# Altium PCB POVBase.PcbDoc (part 3 of 3)
Units mm, origin at the board's own origin, x right, y up, seen from the top; angles counter-clockwise.
Board outline 80 x 80 mm, 2 copper layers (Top Layer, Bottom Layer); 110 components, 82 nets, 474 pads, 224 vias.
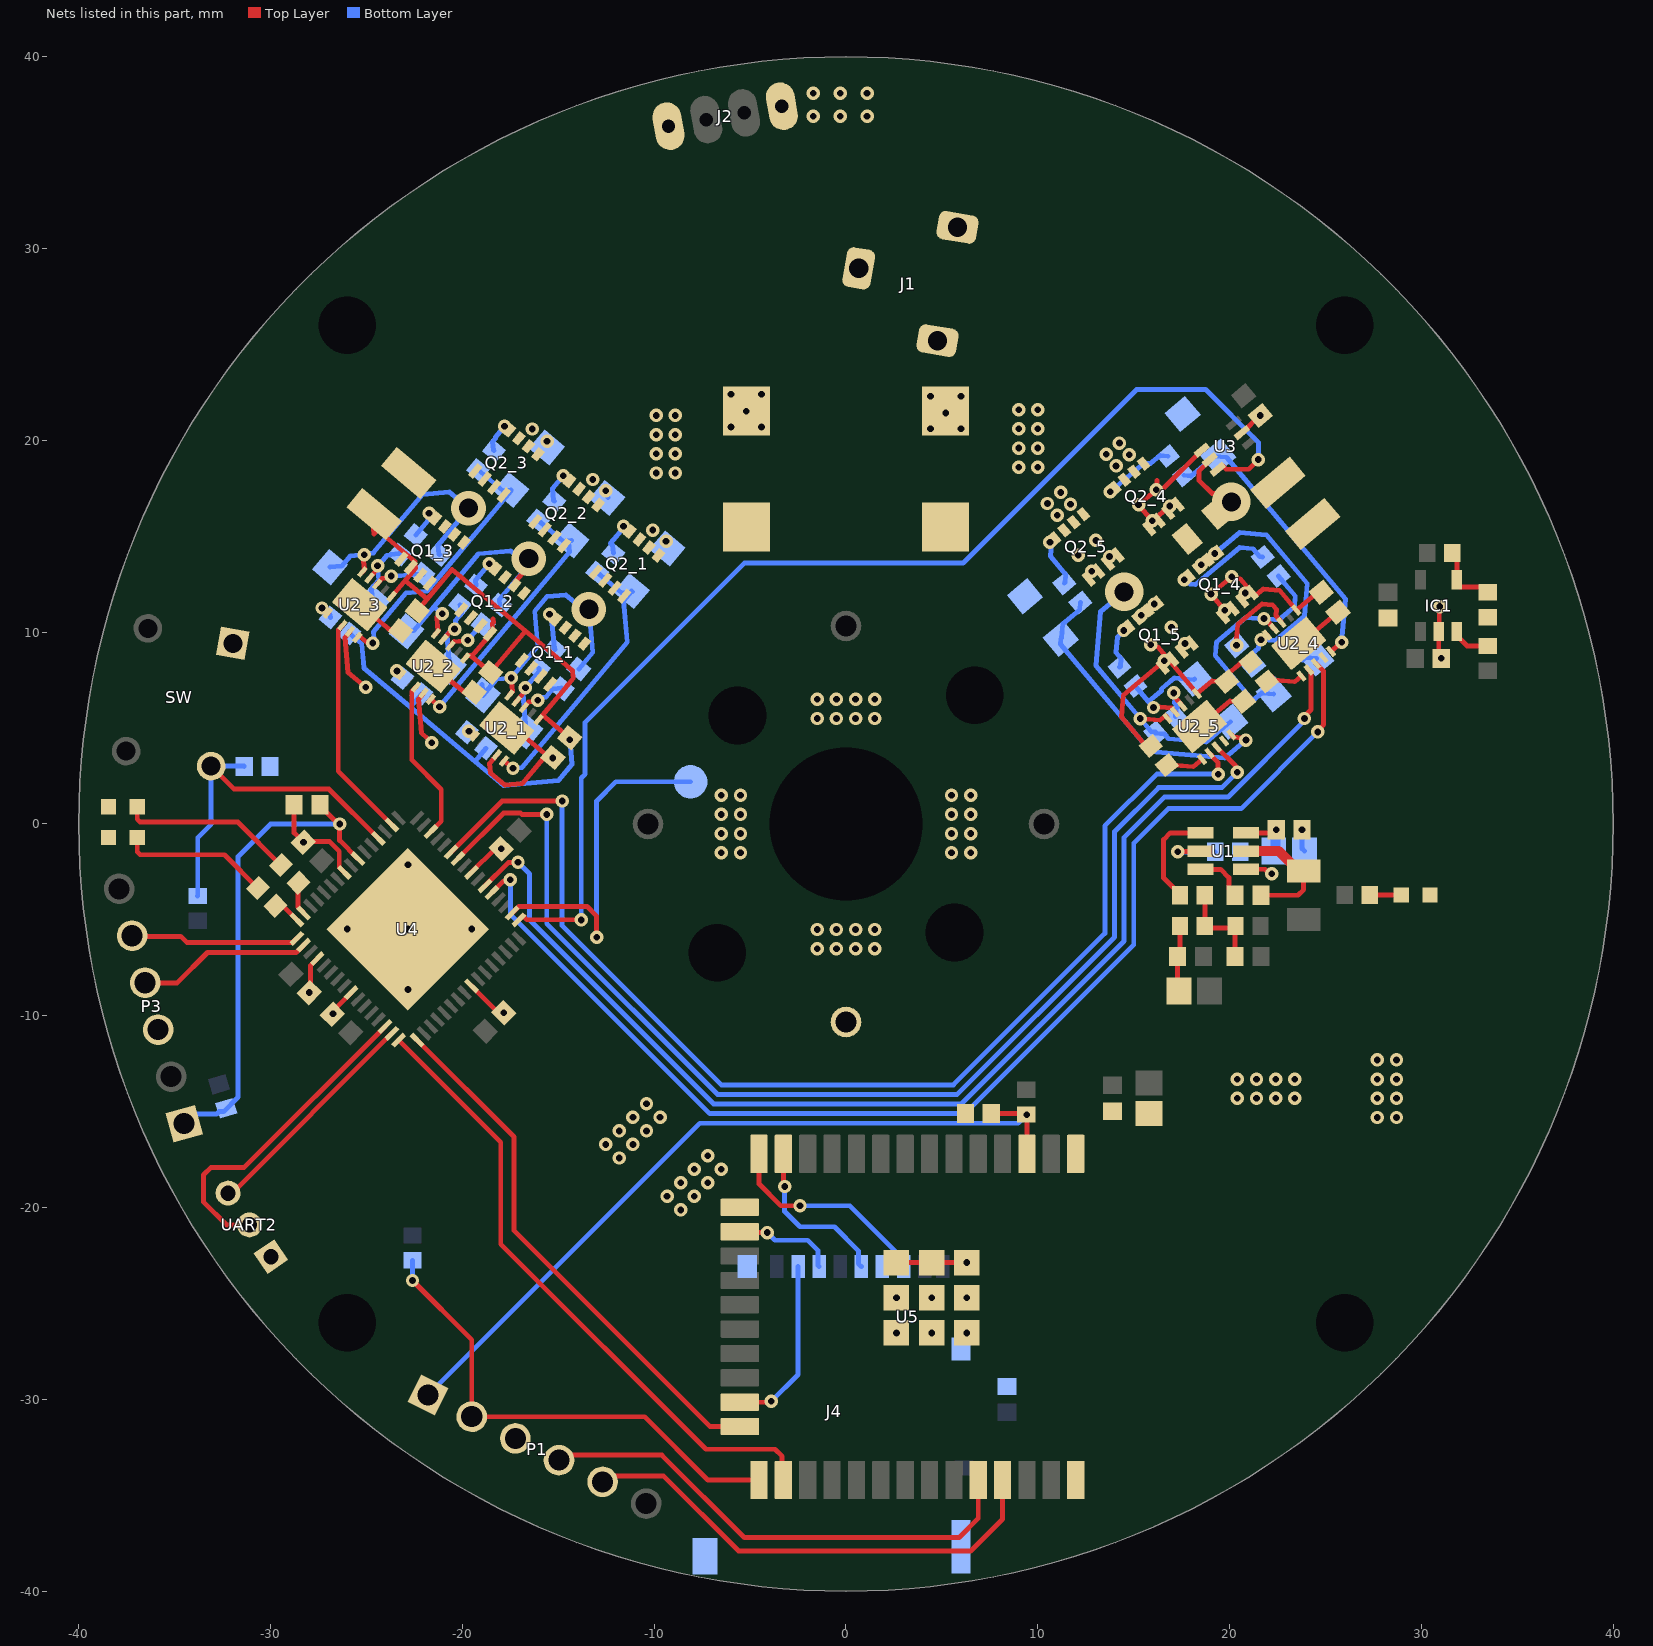
[diagram p2: the nets of this part, all layers, seen from the top]

## Via types
v1: diameter 0.7, hole 0.35, Top Layer to Bottom Layer, tented both sides, 219 vias
v2: diameter 1.8, hole 1, Top Layer to Bottom Layer, tented top, 3 vias
v3: diameter 2, hole 1, Top Layer to Bottom Layer, tented top, 2 vias

## Nets (pads, with @x,y where several pads share a name; then routed paths per layer and width w, separated by ;. In a path a pad name is that pad's centre, name@x,y a point inside that pad or via, vN(x,y) a via of type N, cw(c..) or ccw(c..) an arc to the next point about the centre after c; other vN are vias at no path point) (continued)
BLDC_LOW2: U2_2.8 U4.62 | length 8.5
  Top Layer w0.254: U2_2.8@-22.415,7.146 -22.642,6.919 -22.642,3.342 -21.1,1.8 -21.1,0.151 U4.62@-21.648,-0.397
BLDC_LOW3: U2_3.8 U4.2 | length 11.7
  Top Layer w0.254: U2_3.8@-26.248,10.36 -26.472,10.135 -26.472,2.752 U4.2@-23.678,-0.043
BLDC_OUT1: C11_1.1 D3_1.1 Q1_1.1 Q1_1.2 Q1_1.3 Q2_1.5 Q2_1.6 Q2_1.7 Q2_1.8 U2_1.5 | length 14.2
  Top Layer w0.254: U2_1.5@-17.554,6.72 -17.392,6.913 v1(-17.453,7.617)
  Bottom Layer w0.254: D3_1.1@-18.983,7.266 D3_1.1@-18.934,6.705 -18.225,7.55 v1(-17.453,7.617) -16.07,9.266 -16.23,11.094 -15.587,11.86 -14.604,11.946 -13.684,11.175 v2(-13.4,11.2) -13.203,8.946 C11_1.1@-13.926,8.084
BLDC_OUT2: C11_2.1 D3_2.1 Q1_2.1 Q1_2.2 Q1_2.3 Q2_2.5 Q2_2.6 Q2_2.7 Q2_2.8 U2_2.5 | length 14.6
  Top Layer w0.254: U2_2.5@-21.381,9.934 -21.274,10.061 -21.336,10.765 v1@-21.314,10.791 ; Q1_2.2@-17.275,12.454 -17.286,12.571 -16.511,13.494 v2(-16.541,13.835)
  Bottom Layer w0.254: D3_2.1@-22.917,10.048 -22.532,10.082 -21.487,11.328 ; v1(-21.045,10.957) -21.487,11.328 ; C11_2.1@-18.05,11.414 -18.075,11.696 -16.516,13.554 v2(-16.541,13.835) -16.958,13.799 -17.483,14.24 -19.167,14.093 -21.487,11.328
BLDC_OUT3: C11_3.1 D3_3.1 Q1_3.1 Q1_3.2 Q1_3.3 Q2_3.5 Q2_3.6 Q2_3.7 Q2_3.8 U2_3.5 | length 13.2
  Top Layer w0.254: U2_3.5@-25.214,13.148 -25.107,13.275 -25.146,13.715 -25.025,13.859 v1@-25.036,13.979
  Bottom Layer w0.254: D3_3.1@-26.901,13.39 -26.29,13.444 -25.84,13.98 v1(-25.112,14.044) -25.066,14.099 -24.643,14.136 -22.086,17.183 -20.677,17.306 v2(-19.682,16.471) -19.678,16.433 -21.269,14.537 -21.229,14.082 C11_3.1@-21.191,14.05
COIL_HI1: U2_4.7 U4.54 | length 64.1
  Top Layer w0.254: U4.54@-18.82,-3.225 -17.61,-2.016 -17.116,-2.016 v1(-17.1,-2) ; v1(23.9,5.5) 23.9,5.621 24.243,5.963 24.243,7.921 U2_4.7@24.126,8.037
  Bottom Layer w0.254: v1(-17.1,-2) -16.5,-2.6 -16.5,-5 -6.9,-14.6 6,-14.6 14.5,-6.1 14.5,-0.7 16.6,1.4 19.916,1.4 23.9,5.384 v1(23.9,5.5)
COIL_HI2: U2_5.7 U4.59 | length 62.3
  Top Layer w0.254: U4.59@-20.588,-1.457 -17.93,1.2 v1(-14.8,1.2) ; U2_5.7@18.946,3.69 19.091,3.545 19.091,3.508 19.4,3.199 v1(19.4,2.6)
  Bottom Layer w0.254: v1(-14.8,1.2) -14.8,-5.3 -6.5,-13.6 5.6,-13.6 13.5,-5.7 13.5,-0.1 16.2,2.6 v1(19.4,2.6)
COIL_I_SENSE: U3.6 U4.49 | length 60.6
  Top Layer w0.254: U4.49@-17.052,-4.993 -16.845,-4.786 -16.841,-4.786 -16.634,-4.993 -13.807,-4.993 v1(-13.8,-5) ; U3.6@19.375,18.495 19.536,18.656 19.655,18.656 19.816,18.495 20.995,18.495 v1(21.5,19)
  Bottom Layer w0.254: v1(-13.8,-5) -13.8,-4.879 -13.8,2.4 -13.6,2.6 -13.6,5.3 -5.3,13.6 6.1,13.6 15.154,22.654 18.746,22.654 21.5,19.9 v1(21.5,19)
COIL_LOW1: U2_4.8 U4.53 | length 64.6
  Top Layer w0.254: U4.53@-18.466,-3.579 -17.873,-2.985 -17.585,-2.985 v1(-17.5,-2.9) ; U2_4.8@24.509,8.358 24.851,8.016 24.9,7.968 24.9,5.172 24.6,4.872 v1(24.6,4.8)
  Bottom Layer w0.254: v1(-17.5,-2.9) -17.5,-4.7 -7.1,-15.1 6.2,-15.1 15,-6.3 15,-1 16.8,0.8 20.6,0.8 v1(24.6,4.8)
COIL_LOW2: U2_5.8 U4.58 | length 63
  Top Layer w0.254: U4.58@-20.234,-1.811 -17.855,0.568 -16.966,0.568 -16.899,0.5 v1(-15.6,0.5) ; U2_5.8@19.329,4.012 20.315,3.026 20.315,2.785 v1(20.4,2.7)
  Bottom Layer w0.254: v1(-15.6,0.5) -15.6,-5.2 -6.7,-14.1 5.8,-14.1 14,-5.9 14,-0.4 16.3,1.9 19.6,1.9 v1(20.4,2.7)
COIL_OUT1: C11_4.1 D3_4.1 Q1_4.1 Q1_4.2 Q1_4.3 Q2_4.5 Q2_4.6 Q2_4.7 Q2_4.8 R10.1 U2_4.5 U3.4 | length 23.7
  Top Layer w0.254: v1@16.178,17.424 v1(16.172,17.419) ; 16.221,17.917 v1@16.178,17.425 ; v1(16.879,16.577) 16.668,16.4 16.171,15.982 v1(15.96,15.805) v1(15.253,16.648) v1(16.172,17.419) ; v1(18.528,13.522) v1(19.218,14.101) 19.237,14.078 Q1_4.1@19.371,14.19 ; U3.4@18.54,19.491 16.553,17.505 16.257,17.505 v1@16.178,17.425 ; v1(21.637,9.603) U2_4.5@21.943,9.861 ; v1(16.172,17.419) v1@16.178,17.425
  Bottom Layer w0.254: v1(19.218,14.101) 20.52,15.193 21.929,15.07 24.05,12.542 23.902,10.852 22.753,9.887 ; C11_4.1@21.245,8.263 21.284,8.718 21.156,8.871 21.513,9.171 21.545,9.526 v1(21.637,9.603) 21.663,9.625 22.367,9.564 22.753,9.887 ; D3_4.1@24.524,8.632 23.961,8.681 23.808,8.553 22.747,9.817 22.753,9.887
COIL_OUT2: C11_5.1 D3_5.1 Q1_5.1 Q1_5.2 Q1_5.3 Q2_5.5 Q2_5.6 Q2_5.7 Q2_5.8 U2_5.5 | length 16.3
  Top Layer w0.254: v1(15.342,5.496) 16.366,5.407 16.646,5.642 16.656,5.641 U2_5.5@16.763,5.514 ; v1(15.388,10.887) v1(16.077,11.465) 16.096,11.442 Q1_5.1@16.23,11.555
  Bottom Layer w0.254: v3(14.5,12.1) 13.274,11.072 13.028,8.254 v1(15.342,5.496) 15.904,4.826 16.151,4.804 C11_5.1@16.145,4.734 16.6,4.694 16.809,4.445 18.784,4.272 D3_5.1@20.048,5.333
  other v1: 12.819,13.17 13.738,13.941 12.112,14.012 13.031,14.784
DEBUG_LED1: R16.1 U4.15 | length 1.7
  Top Layer w0.254: R16.1@-28.54,-3.06 -28.576,-3.095 -28.576,-4.333 -28.274,-4.635 U4.15@-28.274,-4.639
DEBUG_LED2: R5.1 U4.16 | length 1.4
  Top Layer w0.254: R5.1@-29.736,-4.264 -29.357,-4.264 U4.16@-28.627,-4.993
EN: R3.1 U1.5 | length 3.1
  Top Layer w0.254: v1(17.299,-1.452) 17.318,-1.433 18.458,-1.433 U1.5@18.476,-1.415
  Bottom Layer w0.254: v1(17.299,-1.452) R3.1@19.249,-1.452
ESP32_EN: C26.1 P1.1 R15.1 U5.3 | length 41.2
  Top Layer w0.254: C26.1@7.575,-15.1 9.35,-15.1 R15.1@9.4,-15.15 9.435,-15.185 U5.3@9.435,-17.2
  Bottom Layer w0.254: P1.1@-21.783,-29.767 -7.616,-15.6 8.976,-15.6 v1(9.423,-15.152)
ESP_C\S\: J4.2 U5.23 | length 9.3
  Top Layer w0.254: U5.23@-5.535,-30.145 -3.945,-30.145 v1(-3.9,-30.1)
  Bottom Layer w0.254: v1(-3.9,-30.1) -2.5,-28.7 J4.2@-2.5,-23.075
ESP_RX: U4.33 U5.24 | length 28
  Top Layer w0.254: U4.33@-22.355,-11.265 -17.3,-16.32 -17.3,-21.2 -7.085,-31.415 U5.24@-5.535,-31.415
ESP_SCK: J4.5 U5.13 | length 8.6
  Top Layer w0.254: U5.13@-3.265,-17.2 -3.265,-18.835 v1(-3.2,-18.9)
  Bottom Layer w0.254: v1(-3.2,-18.9) -3.2,-20.2 -2.4,-21 -0.6,-21 0.647,-22.247 0.647,-22.922 J4.5@0.8,-23.075
ESP_SDI: J4.7 U5.14 | length 11.1
  Top Layer w0.254: U5.14@-4.535,-17.2 -4.535,-18.765 -3.4,-19.9 v1(-2.4,-19.9)
  Bottom Layer w0.254: v1(-2.4,-19.9) 0.2,-19.9 2.777,-22.477 2.777,-22.852 J4.7@3,-23.075
ESP_SDO: J4.3 U5.16 | length 5.3
  Top Layer w0.254: U5.16@-5.535,-21.255 -5.49,-21.3 v1(-4.1,-21.3)
  Bottom Layer w0.254: v1(-4.1,-21.3) -3.7,-21.7 -2,-21.7 -1.457,-22.243 -1.457,-23.018 J4.3@-1.4,-23.075
ESP_TX: U4.32 U5.26 | length 33.4
  Top Layer w0.254: U4.32@-23.324,-11.265 -18,-16.589 -18,-21.9 -7.3,-32.6 -3.7,-32.6 -3.332,-32.968 -3.332,-34.133 U5.26@-3.265,-34.2
FB: R4.1 U1.4 | length 5.3
  Top Layer w0.254: R4.1@17.411,-3.715 17.411,-3.665 16.561,-2.815 16.561,-0.815 16.911,-0.465 U1.4@18.476,-0.465
GND: C3.1 C4.1 C5.2 C6.1 C7.2 C8.1 C9.1 C10.2 C12_1.1 C12_2.1 C12_3.1 C12_4.1 C12_5.1 C14.2 C15.2 C16.2 C17.2 C18.2 C19.2 C20.2 C21.2 C22.2 C23.2 C24.2 C25.1 C26.2 C27.1 D1.2 D2.2 D4_1.1 D4_2.1 D4_3.1 D4_4.1 D4_5.1 D7.2 IC1.2 J1.2 J1.3 J2.4 J4.6 J4.S P1.3 P3.3 P7.1 Q2_1.1 Q2_1.2 Q2_1.3 Q2_2.1 Q2_2.2 Q2_2.3 Q2_3.1 Q2_3.2 Q2_3.3 Q2_4.1 Q2_4.2 Q2_4.3 Q2_5.1 Q2_5.2 Q2_5.3 R6.1 R14.1 SW.1 U1.1 U2_1.9 U2_1.11 U2_2.9 U2_2.11 U2_3.9 U2_3.11 U2_4.9 U2_4.11 U2_5.9 U2_5.11 U3.2 U4.9 U4.20 U4.25 U4.41 U4.56 U4.65 U5.1 U5.15 U5.38 U5.39 UART2.1 | length 52.6
  Top Layer w0.254: C17.2@-28.775,1 -28.775,-0.466 v1(-28.287,-0.955) -28.251,-0.919 -26.922,-0.919 -26.422,-1.419 -26.422,-2.046 -26.422,-2.245 -26.153,-2.514 U4.9@-26.153,-2.518 ; v1(-27.981,-8.79) -27.981,-8.333 -27.923,-8.275 -27.923,-7.383 -27.567,-7.027 U4.20@-27.567,-7.022 ; v1(-26.742,-9.887) -26.742,-9.733 U4.25@-25.799,-8.79 ; U2_3.9@-25.865,10.038 -25.864,10.029 -26.118,9.725 -25.959,7.901 v1(-25.04,7.129) ; U2_3.11@-25.348,11.432 -24.137,10.416 -24.131,10.417 -23.676,10.035 C12_3.1@-23.221,10.075 ; v1(-22.839,-5.478) -22.84,-5.501 U4.65@-22.809,-5.532 ; U2_2.9@-22.032,6.825 -22.031,6.815 -22.288,6.509 -22.132,4.731 -21.596,4.281 v1(-21.592,4.237) ; U2_2.11@-21.515,8.219 -21.512,8.219 -19.846,6.821 C12_2.1@-19.391,6.861 ; U4.41@-19.527,-8.437 -18.121,-9.843 v1(-17.844,-9.843) ; U4.56@-19.527,-2.518 -18.295,-1.286 v1(-17.979,-1.286) ; U2_1.9@-18.204,3.611 -18.204,3.601 -18.582,3.15 -18.539,2.656 -17.786,2.024 -16.879,2.104 -15.793,3.398 C12_1.1@-15.423,3.43 ; U2_1.11@-17.687,5.004 -17.335,5.035 C12_1.1@-15.423,3.43 ; C12_1.1@-15.274,3.466 v1(-15.295,3.442) C12_1.1@-15.423,3.43 ; U5.39@2.63,-22.865 U5.39@4.465,-22.865 v1(6.3,-22.865) ; R6.1@17.411,-5.315 17.411,-6.79 C3.1@17.286,-6.915 17.286,-8.64 C4.1@17.361,-8.715 C4.1@17.449,-8.802 ; U2_5.11@18.429,5.084 20.018,6.418 20.688,6.359 C12_5.1@20.726,6.391 ; U3.2@20.643,20.407 20.673,20.407 21.566,21.3 v1(21.6,21.3) ; U1.1@20.846,-2.365 20.853,-2.358 21.845,-2.358 22.087,-2.6 v1(22.2,-2.6) ; U2_4.11@23.609,9.431 23.715,9.422 C12_4.1@25.649,11.045 ; D1.2@30.294,-3.544 D1.2@30.45,-3.7 ; v1(30.953,11.334) 30.928,11.309 30.928,10.059 IC1.2@30.903,10.034 30.903,8.759 v1(31.028,8.634)
  Bottom Layer w0.254: D4_2.1@-12.42,17.038 D4_2.1@-12.401,17.022 ; v1(23.775,-0.3) 23.775,-1.275 C6.1@23.9,-1.4
  other v1: 2.63,-26.535 4.465,-26.535 6.3,-26.535 2.63,-24.7 4.465,-24.7 6.3,-24.7 -8.621,-20.121 -9.328,-19.414 -7.914,-19.414 -8.621,-18.707 -7.207,-18.707 -7.914,-18 -6.5,-18 -11.814,-17.414 -7.207,-17.293 -12.521,-16.707 -11.107,-16.707 -11.814,-16 -10.4,-16 -11.107,-15.293 -9.693,-15.293 27.7,-15.3 28.7,-15.3 -10.4,-14.586 20.4,-14.3 21.4,-14.3 22.4,-14.3 23.4,-14.3 27.7,-14.3 28.7,-14.3 20.4,-13.3 21.4,-13.3 22.4,-13.3 23.4,-13.3 27.7,-13.3 28.7,-13.3 27.7,-12.3 28.7,-12.3 -22.839,-8.632 -1.5,-6.5 -0.5,-6.5 0.5,-6.5 1.5,-6.5 -26.009,-5.478 -19.509,-5.478 -1.5,-5.5 -0.5,-5.5 0.5,-5.5 1.5,-5.5 -22.839,-2.132 -6.5,-1.5 -5.5,-1.5 5.5,-1.5 6.5,-1.5 -6.5,-0.5 -5.5,-0.5 5.5,-0.5 6.5,-0.5 -6.5,0.5 -5.5,0.5 5.5,0.5 6.5,0.5 -6.5,1.5 -5.5,1.5 5.5,1.5 6.5,1.5 -1.5,5.5 -0.5,5.5 0.5,5.5 1.5,5.5 -1.5,6.5 -0.5,6.5 0.5,6.5 1.5,6.5 -9.38,14.746 -10.07,15.324 11.017,16.096 11.706,16.674 10.502,16.709 11.192,17.287 -12.521,17.381 -13.211,17.96 -9.9,18.3 -8.9,18.3 9,18.6 10,18.6 14.081,18.667 14.77,19.245 13.567,19.28 -9.9,19.3 -8.9,19.3 9,19.6 10,19.6 14.256,19.858 -15.585,19.952 -9.9,20.3 -8.9,20.3 -16.351,20.595 4.4,20.6 6,20.6 9,20.6 10,20.6 -6,20.7 -4.4,20.7 -9.9,21.3 -8.9,21.3 5.2,21.425 -5.2,21.525 9,21.6 10,21.6 4.4,22.3 6,22.3 -6,22.4 -4.4,22.4 -1.7,36.9 -0.3,36.9 1.1,36.9 -1.7,38.1 -0.3,38.1 1.1,38.1
I: TP1.1 U4.50 | length 18.3
  Top Layer w0.254: U4.50@-17.406,-4.639 -17.401,-4.639 -17.062,-4.3 -13.5,-4.3 -13,-4.8 v1(-13,-5.9)
  Bottom Layer w0.254: v1(-13,-5.9) -13,1.2 -12,2.2 TP1.1@-8.1,2.2
IO_0: P1.2 R17.2 U5.25 | length 25.8
  Top Layer w0.254: v1(-22.6,-23.8) -19.51,-26.89 P1.2@-19.51,-30.9 -10.5,-30.9 -7.2,-34.2 U5.25@-4.535,-34.2
  Bottom Layer w0.254: v1(-22.6,-23.8) R17.2@-22.6,-22.75
MCLR: C17.1 P3.1 R20.1 U4.7 | length 25.6
  Top Layer w0.254: C17.1@-27.425,1 -27.425,0.95 -26.475,0 v1(-26.4,0) -26.4,-0.857 U4.7@-25.445,-1.811
  Bottom Layer w0.254: P3.1@-34.503,-15.619 -34.003,-15.119 -32.815,-15.119 -32.688,-14.992 -32.447,-14.992 -31.7,-14.245 -31.7,-1.7 -30,0 v1(-26.4,0)
NetC1_2: C1.2 U1.6 | length 2.7
  Top Layer w0.254: U1.6@18.476,-2.365 19.532,-2.365 19.963,-2.796 19.963,-3.392 C1.2@20.286,-3.715
NetC2_1: C2.1 R2.1 R4.2 R6.2 | length 4.8
  Top Layer w0.254: R6.2@18.711,-5.315 R6.2@18.711,-5.365 ; R4.2@18.711,-3.715 R6.2@18.711,-5.365 ; R2.1@20.211,-5.415 18.761,-5.415 R6.2@18.711,-5.365 ; C2.1@20.286,-6.915 20.286,-5.44 20.286,-5.34 R2.1@20.311,-5.315
NetC11_1_2: C11_1.2 U2_1.3 | length 2.3
  Top Layer w0.254: U2_1.3@-16.788,6.077 -16.543,6.368 -16.241,6.395 v1@-16.164,6.486
  Bottom Layer w0.254: v1@-16.041,6.497 -15.963,6.59 -15.643,6.618 -15.287,7.042 -14.832,7.082 C11_1.2@-14.794,7.05
  other v1: -16.073,6.459
NetC11_2_2: C11_2.2 U2_2.3 | length 2.2
  Top Layer w0.254: U2_2.3@-20.615,9.291 -20.435,9.505 -19.731,9.567 v1(-19.718,9.583)
  Bottom Layer w0.254: v1(-19.718,9.583) -19.059,10.368 C11_2.2@-18.918,10.38
NetC11_3_2: C11_3.2 U2_3.3 | length 2.6
  Top Layer w0.254: U2_3.3@-24.448,12.505 -24.438,12.506 -24.194,12.796 -23.779,12.833 v1(-23.701,12.925)
  Bottom Layer w0.254: v1(-23.701,12.925) -23.682,12.909 -22.097,13.048 C11_3.2@-22.059,13.016
NetC11_4_2: C11_4.2 U2_4.3 | length 4.4
  Top Layer w0.254: v1(20.361,9.316) 20.332,9.35 20.425,10.414 21.685,11.471 22.249,11.422 22.452,11.18 22.423,10.855 22.71,10.513 U2_4.3@22.709,10.503
NetC11_5_2: C11_5.2 U2_5.3 | length 2.2
  Top Layer w0.254: v1(17.091,6.834) 17.169,6.741 17.158,6.61 17.53,6.166 U2_5.3@17.529,6.157
  Bottom Layer w0.254: v1(17.091,6.834) 17.169,6.741 17.132,6.316 17.295,6.121 17.219,6.057 C11_5.2@17.179,5.602
NetC14_1: C14.1 R11.1 SW.2 U4.4 | length 19.1
  Top Layer w0.254: SW.2@-33.097,3.017 -31.897,1.817 -26.953,1.817 U4.4@-24.385,-0.75
  Bottom Layer w0.254: R11.1@-33.8,-3.75 -33.797,-3.747 -33.797,-0.709 -33.097,-0.009 SW.2@-33.097,3.017 -31.392,3.017 C14.1@-31.375,3
NetD1_1: D1.1 R1.2 | length 1.6
  Top Layer w0.254: R1.2@27.3,-3.7 D1.1@28.95,-3.7
NetD2_1: D2.1 R5.2 | length 7.8
  Top Layer w0.254: D2.1@-36.95,-0.7 -36.95,-1.451 -36.801,-1.6 -32.4,-1.6 R5.2@-30.66,-3.34
NetD3_1_2: D3_1.2 R8_1.1 U2_1.4 | length 4.3
  Top Layer w0.254: U2_1.4@-17.171,6.398 -16.721,6.935 -16.723,6.934 v1@-16.753,6.96
  Bottom Layer w0.254: D3_1.2@-16.712,4.841 -16.68,4.88 -16.848,6.805 -16.704,6.977 v1(-16.714,7.098) -15.991,7.959 R8_1.1@-16.003,8.098
NetD3_2_2: D3_2.2 R8_2.1 U2_2.4 | length 4.3
  Top Layer w0.254: U2_2.4@-20.998,9.613 -20.548,10.149 -20.55,10.149 v1@-20.581,10.174
  Bottom Layer w0.254: D3_2.2@-20.696,8.184 -20.663,8.222 -20.807,9.863 -20.55,10.169 -20.508,10.173 -20.34,10.374 -20.361,10.609 -20.053,10.976 -20.089,11.396 R8_2.1@-20.128,11.428
  other v1: -20.407,10.161
NetD3_3_2: D3_3.2 R8_3.1 U2_3.4 | length 4.3
  Top Layer w0.254: U2_3.4@-24.831,12.826 -24.83,12.826 -24.348,13.401 v1@-24.346,13.401
  Bottom Layer w0.254: D3_3.2@-24.679,11.526 -24.743,12.263 -24.358,12.723 v1(-24.423,13.465) -24.379,13.469 -23.929,14.005 -23.759,14.02 -23.727,14.059 -23.307,14.095 R8_3.1@-23.268,14.063
NetD3_4_2: D3_4.2 R8_4.1 U2_4.4 | length 12.5
  Top Layer w0.254: v1(21.791,10.712) 21.879,10.704 22.317,10.183 U2_4.4@22.326,10.182
  Bottom Layer w0.254: D3_4.2@22.303,6.768 21.669,6.824 21.209,6.438 19.249,8.774 19.31,9.479 20.842,10.764 21.758,10.684 v1(21.791,10.712) 21.796,10.705 22.559,10.638 23.376,11.323 23.425,11.887 R8_4.1@22.557,12.921
NetD3_5_2: D3_5.2 R8_5.1 U2_5.4 | length 5.6
  Top Layer w0.254: v1(16.031,6.075) 16.089,6.123 16.969,6.046 U2_5.4@17.146,5.835
  Bottom Layer w0.254: R8_5.1@15.099,7.185 15.774,6.381 ; v1(16.031,6.075) 15.774,6.381 ; D3_5.2@18.184,7.554 18.145,7.522 17.121,7.612 16.452,7.051 16.443,6.942 15.774,6.381
NetD4_1_2: D4_1.2 R9_1.1 U2_1.10 | length 14.6
  Top Layer w0.254: U2_1.10@-17.821,3.289 v1(-17.362,2.904)
  Bottom Layer w0.254: v1(-17.362,2.904) -16.885,2.945 -11.402,9.48 -11.591,11.644 D4_1.2@-11.175,12.14 ; R9_1.1@-12.965,13.119 -11.701,12.058 D4_1.2@-11.137,12.108
NetD4_2_2: D4_2.2 R9_2.1 U2_2.10 | length 13.9
  Top Layer w0.254: U2_2.10@-21.649,6.503 v1(-21.189,6.118)
  Bottom Layer w0.254: v1(-21.189,6.118) -14.423,14.182 -14.465,14.672 D4_2.2@-14.563,14.754 ; R9_2.1@-16.041,15.831 -14.739,14.738 D4_2.2@-14.563,14.754 ; D4_2.2@-14.316,14.775 -14.439,14.765 D4_2.2@-14.563,14.754
NetD4_3_2: D4_3.2 R9_3.1 U2_3.10 | length 14.4
  Top Layer w0.254: U2_3.10@-25.482,9.717 -25.399,9.816 -25.389,9.817 -25,9.49 -24.766,9.51 v1(-24.673,9.433)
  Bottom Layer w0.254: v1(-24.673,9.433) -24.596,9.525 -24.639,10.024 -22.952,12.035 -21.852,12.131 -17.454,17.373 D4_3.2@-17.457,17.411 -17.88,17.374 R9_3.1@-19.182,18.467
NetD4_4_2: D4_4.2 R9_4.1 U2_4.10 | length 15.2
  Top Layer w0.254: U2_4.10@25.275,9.001 v1(25.84,9.475)
  Bottom Layer w0.254: R9_4.1@17.623,18.18 17.991,18.147 18.303,18.409 18.307,18.409 19.221,19.175 19.835,19.122 26.037,11.729 v1(25.84,9.475)
NetD4_5_2: D4_5.2 R9_5.1 U2_5.10 | length 16.1
  Top Layer w0.254: U2_5.10@20.095,4.654 20.202,4.527 20.645,4.488 20.731,4.386 v1(20.851,4.375)
  Bottom Layer w0.254: R9_5.1@12.216,11.554 12.183,11.171 11.302,10.432 11.237,9.688 D4_5.2@11.199,9.656 11.174,9.374 15.864,3.785 19.744,3.446 v1(20.851,4.375)
NetD7_1: D7.1 R16.2 | length 9.1
  Top Layer w0.254: D7.1@-36.95,0.9 -36.95,0.249 -36.801,0.1 -31.7,0.1 R16.2@-29.46,-2.14
NetIC1_3: IC1.3 R12.1 | length 2
  Top Layer w0.254: IC1.3@31.853,10.034 31.853,9.809 32.378,9.284 R12.1@33.453,9.284
NetIC1_4: IC1.4 R13.1 R14.2 | length 3.5
  Top Layer w0.254: R13.1@31.603,14.134 31.853,13.884 31.853,12.509 32.001,12.361 33.176,12.361 R14.2@33.453,12.084
NetQ1_1_4: Q1_1.4 R8_1.2 | length 2.3
  Top Layer w0.254: v1(-15.456,10.928) Q1_1.4@-15.13,10.655
  Bottom Layer w0.254: v1(-15.456,10.928) -15.445,10.808 -15.346,10.724 -15.206,9.126 R8_1.2@-15.168,9.093
NetQ1_2_4: Q1_2.4 R8_2.2 | length 1.9
  Top Layer w0.254: v1@-18.642,13.51 -18.592,13.514 -18.32,13.286 Q1_2.4@-18.271,13.29
  Bottom Layer w0.254: R8_2.2@-19.292,12.424 -19.317,12.705 v1(-18.597,13.563)
NetQ1_3_4: Q1_3.4 R8_3.2 | length 1.8
  Top Layer w0.254: v1(-21.737,16.199) Q1_3.4@-21.412,15.926
  Bottom Layer w0.254: R8_3.2@-22.433,15.059 -21.79,15.824 -21.815,16.106 v1(-21.737,16.199)
NetQ1_4_4: Q1_4.4 R8_4.2 | length 5.4
  Top Layer w0.254: v1@17.609,12.751 v1(17.628,12.728) Q1_4.4@17.877,12.937
  Bottom Layer w0.254: v1(17.628,12.728) 17.749,12.717 17.922,12.51 18.225,12.484 20.523,14.412 21.217,14.352 21.571,13.93 R8_4.2@21.722,13.917
NetQ1_5_4: Q1_5.4 R8_5.2 | length 2.2
  Bottom Layer w0.254: R8_5.2@14.264,8.181 14.302,8.213 14.339,8.633 14.082,8.94 14.152,9.748 14.482,10.025 v1(14.488,10.092)
NetQ2_1_4: Q2_1.4 R9_1.2 | length 2.1
  Top Layer w0.254: v1(-11.599,15.524) Q2_1.4@-11.274,15.251
  Bottom Layer w0.254: R9_1.2@-12.129,14.115 -12.166,14.535 -12.281,14.631 -11.606,15.436 v1@-11.612,15.509
NetQ2_2_4: Q2_2.4 R9_2.2 | length 2
  Top Layer w0.254: v1@-14.721,18.183 -14.719,18.161 -14.416,17.907 Q2_2.4@-14.414,17.886
  Bottom Layer w0.254: R9_2.2@-15.205,16.827 -15.244,16.859 -15.299,17.493 v1(-14.74,18.16)
NetQ2_3_4: Q2_3.4 R9_3.2 | length 1.9
  Top Layer w0.254: v1@-17.785,20.754 -17.783,20.733 -17.557,20.543 Q2_3.4@-17.555,20.522
  Bottom Layer w0.254: R9_3.2@-18.346,19.462 -18.385,19.495 -18.421,19.914 -18.268,20.097 -18.274,20.171 v1(-17.804,20.731)
NetQ2_4_4: Q2_4.4 R9_4.2 | length 4.1
  Top Layer w0.254: v1@13.752,17.347 v1(13.772,17.324) Q2_4.4@14.021,17.533
  Bottom Layer w0.254: v1(13.772,17.324) 15.557,18.822 15.869,18.794 16.367,19.212 R9_4.2@16.787,19.175
NetQ2_5_4: Q2_5.4 R9_5.2 | length 2.5
  Bottom Layer w0.254: v1(10.631,14.689) 10.708,14.596 10.653,13.959 11.456,13.002 11.419,12.582 R9_5.2@11.381,12.55
NetR7_1_2: R7_1.2 U2_1.6 | length 0.4
  Top Layer w0.254: v1(-19.657,4.832) v1(-19.657,4.832) U2_1.6@-19.353,4.575
NetR7_2_2: R7_2.2 U2_2.6 | length 0.3
  Top Layer w0.254: v1(-23.411,7.982) U2_2.6@-23.181,7.789
NetR7_3_2: R7_3.2 U2_3.6 | length 1.1
  Top Layer w0.254: v1(-27.317,11.26) -27.317,11.259 U2_3.6@-27.014,11.003 U2_3.6@-27.014,11.003
  Bottom Layer w0.254: v1(-27.317,11.26) -26.896,10.906 R7_3.2@-26.884,10.766
NetR7_4_2: R7_4.2 U2_4.6 | length 2.1
  Top Layer w0.254: R7_4.2@21.936,7.439 22.202,7.663 22.329,7.511 23.389,7.418 U2_4.6@23.743,7.716
NetR7_5_2: R7_5.2 U2_5.6 | length 2
  Top Layer w0.254: R7_5.2@16.726,3.068 16.765,3.1 18.103,2.983 U2_5.6@18.563,3.369
NetR10_2: R10.2 U3.5 | length 3.5
  Top Layer w0.254: U3.5@18.957,18.993 18.957,18.949 18.4,18.391 18.4,17.916 19.085,17.231 19.181,17.231 19.62,16.792 v3(20.092,16.792)
PGC: P3.5 U4.17 | length 8.8
  Top Layer w0.254: P3.5@-37.218,-5.829 -37.19,-5.856 -34.69,-5.856 -34.372,-6.174 -28.84,-6.174 U4.17@-28.627,-5.962
PGD: P3.4 U4.18 | length 9.1
  Top Layer w0.254: P3.4@-36.539,-8.276 -36.53,-8.285 -36.471,-8.285 -34.871,-8.285 -33.286,-6.7 -28.663,-6.7 -28.278,-6.315 U4.18@-28.274,-6.315
SW: C1.1 L1.1 U1.2 | length 6.8
  Top Layer w0.254: C1.1@21.636,-3.715 23.567,-3.715 23.861,-3.421 L1.1@23.861,-2.44
  Top Layer w0.512: U1.2@20.846,-1.415 22.561,-1.415 23.586,-2.44 L1.1@23.861,-2.44
U0RX: P1.4 U5.34 | length 26.2
  Top Layer w0.254: P1.4@-14.963,-33.167 -14.697,-32.9 -9.6,-32.9 -5.3,-37.2 5.9,-37.2 6.895,-36.205 U5.34@6.895,-34.2
U0TX: P1.5 U5.35 | length 25.3
  Top Layer w0.254: P1.5@-12.69,-34.3 -12.39,-34 -9.5,-34 -5.6,-37.9 6.5,-37.9 8.165,-36.235 U5.35@8.165,-34.2
U4_RX: U4.30 UART2.2 | length 17
  Top Layer w0.254: UART2.2@-31.1,-20.9 -32.3,-20.9 -33.5,-19.7 -33.5,-18.3 -33.1,-17.9 -31.373,-17.9 U4.30@-24.031,-10.558
U4_TX: U4.31 UART2.3 | length 12
  Top Layer w0.254: UART2.3@-32.218,-19.242 -32.008,-19.242 U4.31@-23.678,-10.912
VBAT: C5.1 C6.2 C7.1 C8.2 C9.2 C12_1.2 C12_2.2 C12_3.2 C12_4.2 C12_5.2 C15.1 J1.1 J2.1 Q1_1.5 Q1_1.6 Q1_1.7 Q1_1.8 Q1_2.5 Q1_2.6 Q1_2.7 Q1_2.8 Q1_3.5 Q1_3.6 Q1_3.7 Q1_3.8 Q1_4.5 Q1_4.6 Q1_4.7 Q1_4.8 Q1_5.5 Q1_5.6 Q1_5.7 Q1_5.8 R3.2 R7_1.1 R7_2.1 R7_3.1 R7_4.1 R7_5.1 U1.3 U2_1.1 U2_2.1 U2_3.1 U2_4.1 U2_5.1 | length 77.1
  Top Layer w0.254: C9.2@-24.177,15.936 -24.627,15.399 -24.603,15.118 -24.225,15.568 -24.186,15.13 -22.48,13.698 -22.466,13.544 -22.448,13.333 U2_3.1@-23.682,11.862 ; -22.836,12.558 -21.839,11.722 ; C12_3.2@-22.353,11.109 -21.839,11.722 ; U2_2.1@-19.849,8.648 -19.742,8.775 -19.589,8.789 -19.519,8.73 ; Q1_2.8@-18.558,9.915 Q1_2.8@-18.539,9.899 ; -18.395,10.692 -18.38,10.52 -18.441,10.447 -18.415,10.151 -18.547,9.994 Q1_2.8@-18.539,9.899 ; U2_1.1@-16.022,5.434 -15.915,5.561 -15.819,5.675 ; v1(-14.396,4.393) -14.404,4.487 -15.819,5.675 ; R7_5.1@15.891,4.064 15.609,4.089 14.356,5.582 14.454,6.709 Q1_5.5@16.389,8.332 ; v1(15.892,9.352) 15.97,9.259 16.251,9.235 U2_5.1@18.295,6.799 19.08,7.458 19.82,7.393 C12_5.2@19.858,7.426 19.892,7.81 20.68,8.472 R7_4.1@21.1,8.435 ; Q1_5.5@16.517,8.179 Q1_5.5@16.389,8.332 ; v1(16.599,8.509) Q1_5.5@16.389,8.332 ; v1@19.745,11.144 19.71,10.752 19.706,10.757 v1(19.74,11.145) v1(19.033,11.987) v1(20.105,12.887) 20.168,12.813 20.555,12.779 Q1_4.8@21.152,12.068 21.284,11.911 21.344,11.905 21.751,12.246 22.616,12.171 U2_4.1@23.475,11.146 24.605,12.094 C12_4.2@24.781,12.079 ; U1.3@20.969,-0.465 22.26,-0.465 v1(22.425,-0.3) ; -21.839,11.722 -20.537,13.273 -16.707,10.059 ; -19.519,8.73 C12_2.2@-18.523,7.895 -16.707,10.059 ; -19.519,8.73 Q1_2.8@-18.539,9.899 ; -16.707,10.059 -14.256,8.002 -14.219,7.582 -14.514,7.23 -14.665,7.051 -15.819,5.675
  Bottom Layer w0.254: R7_3.1@-25.888,9.93 -25.249,9.394 -25.138,8.126 -22.751,6.123 ; R7_2.1@-22.134,6.78 -22.681,6.129 -22.751,6.123 ; R7_1.1@-18.764,3.952 -19.342,3.263 ; v1(-14.396,4.393) -14.283,3.107 -14.991,2.264 -17.853,2.013 -19.342,3.263 ; -22.751,6.123 -19.342,3.263
  Bottom Layer w0.512: R3.2@20.549,-1.452 20.601,-1.4 C6.2@22.3,-1.4 22.389,-1.311 22.389,-0.336 v1(22.425,-0.3)
  other v1: 17.672,9.409 16.965,10.252 20.812,12.045
pads on no net: J2.2 J2.3 J4.1 J4.8 J4.9 J4.10 P1.6 P3.6 SW.3 SW.4 U2_1.2 U2_2.2 U2_3.2 U2_4.2 U2_5.2 U4.1 U4.5 U4.6 U4.8 U4.11 U4.12 U4.13 U4.14 U4.21 U4.22 U4.23 U4.24 U4.27 U4.28 U4.29 U4.34 U4.36 U4.37 U4.39 U4.40 U4.42 U4.43 U4.44 U4.45 U4.46 U4.47 U4.48 U4.55 U4.64 U5.4 U5.5 U5.6 U5.7 U5.8 U5.9 U5.10 U5.11 U5.12 U5.17 U5.18 U5.19 U5.20 U5.21 U5.22 U5.27 U5.28 U5.29 U5.30 U5.31 U5.32 U5.33 U5.36 U5.37
copper on no net: | length 1
  Top Layer w0.254: -20.234,-9.144 -20.23,-9.144 -19.781,-9.592 -19.525,-9.592 v1(-19.439,-9.678)

## Polygon pours and split planes (outlines as drawn)
GND on Top Layer "PolygonDirect" (solid, shelved, pour order 29): 11.362,14.819 9.984,16.461 10.015,16.822 14.229,20.358 14.854,20.303 16.111,18.804
VBAT on Top Layer "PolygonDirect" (solid, shelved, pour order 20): 24.558,17.537 26.229,15.546 14.279,5.518 13.575,5.58 12.225,7.188
COIL_OUT2 on Top Layer "PolygonDirect" (solid, shelved, pour order 11): 16.641,11.416 14.198,14.327 12.359,12.784 14.802,9.873
COIL_OUT1 on Top Layer "PolygonDirect" (solid, shelved, pour order 10): 19.781,14.051 17.339,16.962 15.5,15.42 17.943,12.509
VBAT on Top Layer "PolygonDIrect" (solid, shelved, pour order 33): -16.425,5.588 -13.8,3.4 -12.9,3 -11.9,5.8 -10,8.8 -7.6,10.9 -5.4,12.1 -1.9,13.1 0.8,13.2 3,12.9 5.1,12.2 7.2,11.1 9.8,8.9 11.1,7.2 12,5.6 12.6,4.2 16.3,7.2 8.3,17.3 8.3,17.316 2.4,17.316 2.4,22.5 3.3,23.4 5.5,23.4 6.5,24.4 6.5,26.8 -5.7,39 -9.2,39 -10.5,37.7 -10.5,35.2 -2.3,27 -2.3,17.316 -7.3,17.316 -7.3,16.742 -14.859,7.991
GND on Top Layer "PolygonDirect" (solid, shelved, pour order 24): -17.587,20.033 -16.558,21.258 -15.431,21.357 -8.767,15.765 -8.681,14.779 -9.773,13.476
BLDC_OUT3 on Top Layer "PolygonDirect" (solid, shelved, pour order 14): -19.924,14.292 -17.481,17.203 -19.32,18.745 -21.762,15.835
BLDC_OUT2 on Top Layer "PolygonDirect" (solid, shelved, pour order 13): -16.783,11.656 -14.341,14.567 -16.179,16.11 -18.622,13.199
BLDC_OUT1 on Top Layer "PolygonDirect" (solid, shelved, pour order 12): -13.642,9.021 -11.2,11.932 -13.038,13.475 -15.481,10.564
VBAT on Top Layer "PolygonDirect" (solid, shelved, pour order 19): -13.27,5.576 -14.555,4.043 -25.401,13.144 -24.657,14.032 -24.711,14.654 -26.073,15.797 -26.137,16.521 -25.16,17.686 -24.927,17.706 -13.492,8.111
VBAT on Top Layer "PolygonDirect" (solid, shelved, pour order 38): 12.559,4.297 17.855,-1 22.975,-1 22.975,0.325 21.6,1.7 19.2,1.7 14.6,6.3 12.597,4.297
3V3 on Top Layer "PolygonDirect" (solid, shelved, pour order 39): 18.3,-9.5 18.3,-7.8 18.1,-7.6 18.1,-6.5 18.5,-6.1 19.8,-6.1 21.8,-4.1 24.9,-4.1 25.4,-4.6 25.4,-7.5 23.4,-9.5
GND on Top Layer "PolygonDIrect" (solid, shelved, pour order 40): 0.044,-39.917 cw(c0.044,0.044) -39.917,0.044 cw(c0.044,0.044) 0.044,40.004 cw(c0.044,0.044) 40.004,0.044 cw(c0.044,0.044)
COIL_OUT1 on Bottom Layer "PolygonDirect" (solid, shelved, pour order 34): 13.706,16.002 16.084,13.168 18.761,12.934 19.91,13.898 16.31,18.188
COIL_OUT2 on Bottom Layer "PolygonDirect" (solid, shelved, pour order 22): 16.641,11.416 13.169,15.553 11.331,14.01 14.802,9.873
VBAT on Bottom Layer "PolygonDirect" (solid, shelved, pour order 23): 22.105,12.215 20.562,14.054 14.664,9.104 16.207,7.266
3V3 on Bottom Layer "PolygonDirect" (solid, shelved, pour order 35): 22.6,-5.1 22.6,-6.8 21.9,-7.5 20.4,-7.5 20,-7.9 20,-8.8 20.2,-9 23.9,-9 24.7,-8.2 24.7,-4.8 24.3,-4.4 23.3,-4.4
GND on Bottom Layer "PolygonDirect" (solid, shelved, pour order 41): 0.044,-39.917 cw(c0.044,0.044) -39.917,0.044 cw(c0.044,0.044) 0.044,40.004 cw(c0.044,0.044) 40.004,0.044 cw(c0.044,0.044)

## Silkscreen, mask and mechanical layers (free items; w line width, h text height)
Top Overlay:
  circle w1.15: c26,26 r2.1
  circle w0.5: c0,0 r13
  circle w1.15: c-26,-26 r2.1
  circle w1.15: c26,-26 r2.1
  circle w1.15: c-26,26 r2.1
  circle w0.712: c-32.2,-14.9 r0.3
  circle w1.15: c-6.718,-6.718 r2.1
  circle w1.15: c5.657,-5.657 r2.1
  circle w1.15: c-5.657,5.657 r2.1
  circle w1.15: c6.717,6.718 r2.1
  text "BLDC" at -20.646,21.654 h1.52
  text "Coil" at 13.054,20.854 h1.52
  text "Motor" at -35.747,0.453 h0.8
  text "Coil" at -35.847,-1.147 h0.8
  text "3.3V" at 28,-2.5 h1
  text "GND" at -34.096,-10.615 h0.8 r15.5
  text "3V3" at -33.296,-13.015 h0.8 r15.5
  text "Dout" at -29.06,-17.392 h0.8 r34
  text "Din" at -27.86,-19.292 h0.8 r34
  text "GND" at -26.741,-20.95 h0.8 r34
  text "EN" at -20.514,-28.232 h0.8 r63.5
  text "IO0" at -18.24,-29.365 h0.8 r63.5
  text "GND" at -15.967,-30.499 h0.8 r63.5
  text "RX" at -13.694,-31.632 h0.8 r63.5
  text "TX" at -11.421,-32.766 h0.8 r63.5
Bottom Overlay:
  circle w0.5: c0,0 r13
  circle w1.15: c-26,-26 r2.1
  circle w1.15: c26,-26 r2.1
  circle w1.15: c-26,26 r2.1
  circle w1.15: c26,26 r2.1
  circle w1.15: c-6.718,-6.718 r2.1
  circle w1.15: c5.657,-5.657 r2.1
  circle w1.15: c-5.657,5.657 r2.1
  circle w1.15: c6.717,6.718 r2.1
  text "JLCJLCJLCJLC" at 4.7,-30.9 h0.8
Mechanical 1:
  circle w0.254: c0,0 r17.9
Board Outline:
  circle w0.254: c0,0 r40